# Altium PCB Fan_control.PcbDoc (part 2 of 2)
Units mm, origin at the board's own origin, x right, y up, seen from the top; angles counter-clockwise.
Board outline 271 x 20 mm, 2 copper layers (Top Layer, Bottom Layer), stack 1.571 mm thick; 115 components, 80 nets, 358 pads, 372 vias.
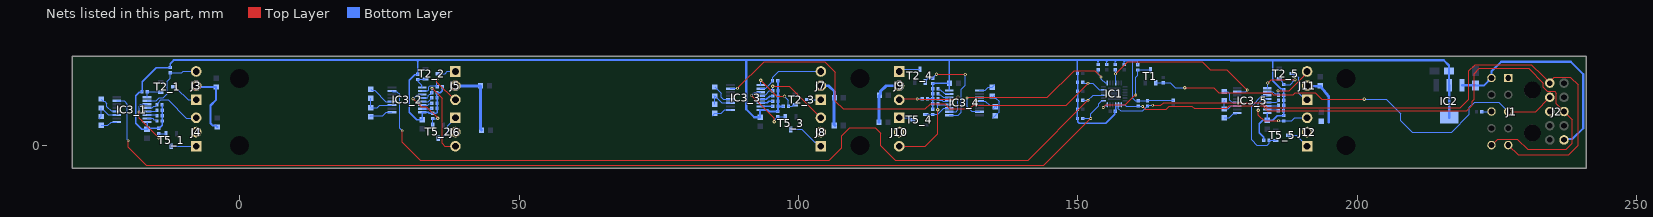
[diagram p2: the nets of this part, all layers, seen from the top]

## Via types
v1: diameter 0.6, hole 0.3, Top Layer to Bottom Layer, tented both sides, 239 vias
v2: diameter 0.5, hole 0.25, Top Layer to Bottom Layer, tented both sides, 88 vias
v3: diameter 0.5, hole 0.2, Top Layer to Bottom Layer, tented both sides, 45 vias

## Nets (pads, with @x,y where several pads share a name; then routed paths per layer and width w, separated by ;. In a path a pad name is that pad's centre, name@x,y a point inside that pad or via, vN(x,y) a via of type N, cw(c..) or ccw(c..) an arc to the next point about the centre after c; other vN are vias at no path point) (continued)
I2C_SDA_0: IC1.1 IC3_1.15 R1.1 | length 192.7
  Top Layer w0.152: v3(-19.963,0.895) -19.97,0.888 -19.97,-0.254 -16.699,-3.524 143.898,-3.524 v3(152.299,4.878)
  Bottom Layer w0.152: IC3_1.15@-21.975,8.055 -20.684,8.055 -20.084,7.455 -20.084,1.11 -19.963,0.989 v3(-19.963,0.895) ; R1.1@150.852,4.878 v3(152.299,4.878) 152.299,5.741 153.722,7.164 153.722,7.488 154.268,8.034 IC1.1@154.546,8.034
I2C_SDA_1: IC1.3 IC3_2.15 R5.1 | length 150.4
  Top Layer w0.152: v3(29.078,2.667) 29.078,0.585 32.278,-2.615 105.46,-2.615 107.729,-0.346 107.729,1.805 109.125,3.201 113.761,3.201 114.7,2.262 114.7,0.025 117.301,-2.576 141.086,-2.576 v3(151.791,8.129)
  Bottom Layer w0.152: IC3_2.15@27.25,9.808 27.355,9.703 28.139,9.703 28.602,9.24 28.602,3.173 29.078,2.697 v3(29.078,2.667) ; R5.1@150.852,8.129 v3(151.791,8.129) 152.696,9.034 154.531,9.034 IC1.3@154.538,9.042 ; R5.1@150.915,8.23 R5.1@150.92,8.225
I2C_SDA_2: IC1.5 IC3_3.15 R8.1 | length 79.4
  Top Layer w0.152: v3(89.069,10.287) 93.826,15.045 104.68,15.045 106.575,13.15 106.575,7.965 107.958,6.583 122.719,6.583 123.619,7.483 126.196,7.483 127.033,6.646 130.647,6.646 131.291,7.29 147.918,7.29 v3(151.817,11.189)
  Bottom Layer w0.152: IC3_3.15@87.825,10.214 87.862,10.251 89.032,10.251 v3(89.069,10.287) ; R8.1@150.852,11.38 151.043,11.189 v3(151.817,11.189) 152.668,11.189 153.823,10.034 IC1.5@154.546,10.034
I2C_SDA_3: IC1.7 IC3_4.15 R10.1 | length 33.8
  Top Layer w0.152: v3(130.15,8.55) 130.244,8.55 130.356,8.662 144.525,8.662 149.301,13.437 153.011,13.437 v3(154.128,12.32)
  Bottom Layer w0.152: v3(130.15,8.55) 130.15,7 130.992,6.158 132.31,6.158 IC3_4.15@132.373,6.095 ; R10.1@153.627,13.585 153.627,12.821 v3(154.128,12.32) 154.195,12.253 154.195,11.923 154.884,11.234 IC1.7@155.246,11.234
I2C_SDA_4: IC1.10 IC3_5.15 R13.1 | length 30.9
  Top Layer w0.152: v3(156.731,12.878) 158.916,15.063 172.225,15.063 173.663,13.625 176.644,13.625 v3(180.311,9.958)
  Bottom Layer w0.152: R13.1@156.711,13.59 156.731,13.569 v3(156.731,12.878) ; IC1.10@156.746,11.234 v3@156.746,12.878 ; IC3_5.15@178.498,9.655 180.008,9.655 v3(180.311,9.958)
I2C_SW_RESET: J1.3 J2.3 R12.2 T1.1 | length 79.9
  Top Layer w0.152: v1(169.115,10.4) 174.275,10.4 175.196,9.479 184.644,9.479 184.977,9.146 188.516,9.146 188.894,9.525 192.434,9.525 193.609,8.35 v1(201.225,8.35) ; J1.3@227,6.122 231.897,6.122 J2.3@234.437,8.662
  Bottom Layer w0.152: T1.1@163.925,11.275 165.22,11.275 R12.2@165.225,11.28 166.519,11.28 167.398,10.4 v1(169.115,10.4) ; v1@201.225,8.306 205.169,8.306 207.736,5.739 207.736,4.496 209.837,2.395 216.845,2.395 220.05,5.6 220.05,6.875 220.962,7.787 225.338,7.787 225.6,7.525 225.6,7.522 J1.3@227,6.122
I2C_SW_RESET_N: IC1.24 R6.2 T1.3 | length 14.6
  Top Layer w0.152: v3(154.535,6.868) 154.535,6.898 154.99,7.353 158.498,7.353 160.101,8.956 160.147,8.956 160.263,9.072 v3(160.357,9.072)
  Bottom Layer w0.152: v3(154.535,6.868) 154.583,6.868 154.957,7.243 155.178,7.243 155.246,7.311 IC1.24@155.246,7.334 ; v3(160.357,9.072) 160.368,9.083 160.368,12.275 160.676,12.583 R6.2@160.676,13.572 T1.3@162.975,13.572
I2C_SW_SCL: IC1.19 J1.10 J2.6 R3.1 | length 113.9
  Top Layer w0.152: v3(161.583,7.038) 162.059,6.562 165.835,6.562 166.347,7.075 170.4,7.075 170.794,6.681 176.627,6.681 177.094,7.149 183.051,7.149 183.9,6.3 219.6,6.3 220.546,7.246 220.546,7.97 220.904,8.327 220.904,12.904 221.829,13.829 230.696,13.829 233.302,11.223 233.302,10.425 233.986,9.74 235.32,9.74 235.625,9.436 235.625,7.474 J2.6@236.977,6.122 238.425,4.674 238.425,0.425 237.355,-0.645 230.473,-0.645 228.653,1.175 225.101,1.175 224.048,0.122 J1.10@224,0.122
  Bottom Layer w0.152: IC1.19@157.746,7.334 158.366,7.334 158.6,7.1 R3.1@160.758,7.1 160.819,7.038 v3(161.583,7.038)
I2C_SW_SDA: IC1.20 J1.5 J2.1 R2.1 | length 117.7
  Top Layer w0.152: v3(163.372,7.245) 164.845,7.245 165.325,7.725 182.925,7.725 183.85,6.8 218.45,6.8 219.946,8.296 219.946,13.396 221.075,14.525 231.124,14.525 233.049,12.6 ; J1.5@227,0.122 228.747,-1.625 237.826,-1.625 239.507,0.056 239.507,10.907 238.133,12.28 235.187,12.28 234.437,11.53 J2.1@234.437,11.202 233.139,12.5 233.139,12.511 233.049,12.6
  Bottom Layer w0.152: IC1.20@157.246,7.334 157.246,6.615 157.628,6.233 161.558,6.233 162.425,7.1 R2.1@162.445,7.1 ; R2.1@162.47,7.075 162.641,7.245 v3(163.372,7.245)
NetC5_1_1: C5_1.1 IC3_1.9 | length 3.1
  Bottom Layer w0.152: C5_1.1@-24.777,3.644 -23.608,3.644 -23.007,4.245 IC3_1.9@-21.975,4.245
NetC5_1_2: C5_1.2 C6_1.2 IC3_1.11 | length 4.9
  Bottom Layer w0.152: C5_1.2@-25.176,4.845 C5_1.2@-24.777,5.244 C6_1.2@-24.777,6.755 ; C6_1.2@-24.396,6.412 -23.5,5.515 IC3_1.11@-21.975,5.515
NetC5_2_1: C5_2.1 IC3_2.9 | length 4.2
  Bottom Layer w0.152: C5_2.1@23.325,5.239 23.483,5.397 25.618,5.397 26.219,5.998 IC3_2.9@27.25,5.998
NetC5_2_2: C5_2.2 C6_2.2 IC3_2.11 | length 5.5
  Bottom Layer w0.152: C6_2.2@23.458,8.507 C6_2.2@23.483,8.507 C5_2.2@23.483,6.997 ; C5_2.2@23.485,6.78 24.575,6.78 25.025,7.23 27.212,7.23 IC3_2.11@27.25,7.268
NetC5_3_1: C5_3.1 IC3_3.9 | length 3.6
  Bottom Layer w0.152: C5_3.1@84.625,5.404 C5_3.1@85.023,5.803 86.193,5.803 86.794,6.404 IC3_3.9@87.825,6.404
NetC5_3_2: C5_3.2 C6_3.2 IC3_3.11 | length 5
  Bottom Layer w0.152: C6_3.2@84.869,9.068 C6_3.2@85.023,8.914 ; C5_3.2@85.023,7.403 C6_3.2@85.023,8.914 ; IC3_3.11@87.825,7.674 86.288,7.674 85.048,8.914 C6_3.2@85.023,8.914
NetC5_4_1: C5_4.1 IC3_4.9 | length 3.1
  Bottom Layer w0.152: IC3_4.9@132.373,9.905 133.377,9.905 133.947,10.475 C5_4.1@134.664,10.475 ; C5_4.1@134.673,10.484 134.698,10.484 135.097,10.883 C5_4.1@135.097,10.908
NetC5_4_2: C5_4.2 C6_4.2 IC3_4.11 | length 7.6
  Bottom Layer w0.152: IC3_4.11@132.373,8.635 134.423,8.635 C5_4.2@134.673,8.884 ; C6_4.2@134.768,4.96 134.768,4.985 135.167,5.384 C6_4.2@135.192,5.384 135.591,5.783 135.672,5.783 135.921,6.031 135.921,7.927 135.312,8.536 135.097,8.536 134.929,8.703 134.929,8.85 C5_4.2@135.097,9.017
NetC5_5_1: C5_5.1 IC3_5.9 | length 2.7
  Bottom Layer w0.152: C5_5.1@176.186,4.989 177.056,4.989 177.789,5.722 178.374,5.722 IC3_5.9@178.498,5.845
NetC5_5_2: C5_5.2 C6_5.2 IC3_5.11 | length 4
  Bottom Layer w0.152: C6_5.2@176.178,8.101 176.203,8.076 176.203,6.611 176.896,6.611 177.4,7.115 IC3_5.11@178.498,7.115
NetC6_1_1: C6_1.1 IC3_1.12 | length 4
  Bottom Layer w0.152: C6_1.1@-24.777,8.355 -24.39,7.967 -24.171,7.967 -23.75,7.547 -23.75,7 -23.024,6.274 -22.099,6.274 IC3_1.12@-21.975,6.15
NetC6_2_1: C6_2.1 IC3_2.12 | length 4.7
  Bottom Layer w0.152: C6_2.1@23.483,10.107 23.656,9.934 24.122,9.934 26.154,7.903 IC3_2.12@27.25,7.903
NetC6_3_1: C6_3.1 IC3_3.12 | length 4.1
  Bottom Layer w0.152: C6_3.1@85.023,10.514 86.166,9.371 86.166,8.698 86.555,8.309 IC3_3.12@87.825,8.309
NetC6_4_1: C6_4.1 IC3_4.12 | length 4.2
  Bottom Layer w0.152: IC3_4.12@132.373,8 133.427,8 134.22,7.207 134.97,7.207 C6_4.1@135.192,6.984 C6_4.1@134.816,6.608 ; C6_4.1@135.443,6.759 C6_4.1@135.443,7.179
NetC6_5_1: C6_5.1 IC3_5.12 | length 3.8
  Bottom Layer w0.152: C6_5.1@176.178,9.701 176.848,9.701 177.201,9.348 177.201,8.128 177.579,7.75 IC3_5.12@178.498,7.75
NetIC3_1_5: IC3_1.5 R22_1.1 | length 1.8
  Bottom Layer w0.152: IC3_1.5@-16.575,6.15 -14.995,6.15 R22_1.1@-14.82,6.325
NetIC3_1_6: IC3_1.6 R21_1.1 | length 1.8
  Bottom Layer w0.152: IC3_1.6@-16.575,5.515 -14.96,5.515 R21_1.1@-14.82,5.375
NetIC3_1_7: IC3_1.7 R23_1.1 | length 2
  Bottom Layer w0.152: IC3_1.7@-16.575,4.88 -15.6,4.88 -15.379,4.659 -15.034,4.659 -14.82,4.445 R23_1.1@-14.82,4.425
NetIC3_2_5: IC3_2.5 R22_2.1 | length 2
  Bottom Layer w0.152: IC3_2.5@32.65,7.903 33.72,7.903 34.152,8.335 34.172,8.335 34.386,8.549 R22_2.1@34.386,8.569
NetIC3_2_6: IC3_2.6 R21_2.1 | length 1.9
  Bottom Layer w0.152: IC3_2.6@32.65,7.268 33.692,7.268 33.957,7.532 34.274,7.532 R21_2.1@34.386,7.644
NetIC3_2_7: IC3_2.7 R23_2.1 | length 1.8
  Bottom Layer w0.152: IC3_2.7@32.65,6.633 34.3,6.633 R23_2.1@34.386,6.719
NetIC3_3_5: IC3_3.5 R22_3.1 | length 2.4
  Bottom Layer w0.25: IC3_3.5@93.225,8.309 94.259,8.309 94.85,8.9 R22_3.1@95.38,8.9
NetIC3_3_6: IC3_3.6 R21_3.1 | length 2.3
  Bottom Layer w0.25: IC3_3.6@93.225,7.674 94.399,7.674 94.7,7.975 R21_3.1@95.375,7.975
NetIC3_3_7: IC3_3.7 R23_3.1 | length 2.2
  Bottom Layer w0.25: IC3_3.7@93.225,7.039 95.369,7.039 R23_3.1@95.38,7.05
NetIC3_4_5: IC3_4.5 R22_4.1 | length 2.2
  Bottom Layer w0.152: R22_4.1@124.94,8.4 124.94,8.38 125.153,8.166 125.683,8.166 125.849,8 IC3_4.5@126.973,8
NetIC3_4_6: IC3_4.6 R21_4.1 | length 2.3
  Bottom Layer w0.152: R21_4.1@124.945,9.325 125.14,9.13 125.368,9.13 125.864,8.635 IC3_4.6@126.973,8.635
NetIC3_4_7: IC3_4.7 R23_4.1 | length 2.4
  Bottom Layer w0.152: R23_4.1@124.945,10.225 125.119,10.051 125.374,10.051 126.068,9.357 126.885,9.357 IC3_4.7@126.973,9.27
NetIC3_5_5: IC3_5.5 R22_5.1 | length 2.2
  Bottom Layer w0.152: IC3_5.5@183.898,7.75 185.48,7.75 185.646,7.916 185.666,7.916 185.88,8.13 R22_5.1@185.88,8.15
NetIC3_5_6: IC3_5.6 R21_5.1 | length 2
  Bottom Layer w0.152: IC3_5.6@183.898,7.115 185.77,7.115 R21_5.1@185.88,7.225
NetIC3_5_7: IC3_5.7 R23_5.1 | length 2
  Bottom Layer w0.152: IC3_5.7@183.898,6.48 185.675,6.48 R23_5.1@185.855,6.3
NetJ1_8: J1.8 R15.2 | length 1.7
  Bottom Layer w0.152: R15.2@222.276,6.122 J1.8@224,6.122
P3V3: C2.1 C7_1.2 C7_2.2 C7_3.2 C7_4.2 C7_5.2 C16.2 IC1.21 IC2.2 IC2.4 IC3_1.8 IC3_2.8 IC3_3.8 IC3_4.8 IC3_5.8 R1.2 R2.2 R3.2 R4.2 R5.2 R6.1 R7.2 R8.2 R9.2 R10.2 R11.2 R13.2 R14.2 R16.2 R17_1.2 R17_2.2 R17_3.2 R17_4.2 R17_5.2 R18_1.2 R18_2.2 R18_3.2 R18_4.2 R18_5.2 R19_1.2 R19_2.2 R19_3.2 R19_4.2 R19_5.2 R20_1.2 R20_2.2 R20_3.2 R20_4.2 R20_5.2 R21_1.2 R21_2.2 R21_3.2 R21_4.2 R21_5.2 R22_1.2 R22_2.2 R22_3.2 R22_4.2 R22_5.2 R23_1.2 R23_2.2 R23_3.2 R23_4.2 R23_5.2 | length 382.2
  Bottom Layer w0.203: R10.2@153.595,14.557 153.595,15.114 ; R11.2@155.153,14.53 155.153,15.19 ; R13.2@156.711,14.53 156.711,15.165 ; R14.2@158.268,14.53 158.288,14.55 158.288,15.19 ; 159.797,15.241 159.797,8.535 160.262,8.07 160.728,8.07 R3.2@160.758,8.04 R2.2@162.445,8.04 162.545,8.14 166.912,8.14 R16.2@166.967,8.085 ; R6.1@160.676,14.512 160.676,15.266
  Bottom Layer w0.254: C7_1.2@-16.589,2.955 -16.387,3.158 -14.397,3.158 -13.88,3.675 R23_1.2@-13.88,4.425 -13.882,4.427 R18_1.2@-13.882,7.297 ; IC3_1.8@-16.575,4.245 -16.575,2.975 -17.5,2.975 -18.573,4.048 -18.573,8.962 -17.98,9.555 -17.59,9.555 -17.468,9.677 -17.468,11.482 -14.967,13.983 R17_1.2@-12.426,13.983 -12.426,14.707 -11.809,15.324 ; 31.868,15.14 31.868,12.811 R19_2.2@31.846,12.789 31.734,12.677 31.327,12.677 30.375,11.725 30.375,5.975 31.7,4.65 C7_2.2@32.65,4.65 IC3_2.8@32.65,5.998 33.702,5.998 33.905,5.795 R20_2.2@34.55,5.795 35.177,5.795 35.326,5.944 R23_2.2@35.326,6.719 R21_2.2@35.326,7.644 35.37,7.688 35.37,8.525 R22_2.2@35.326,8.569 35.304,8.592 R18_2.2@35.304,9.45 ; R18_2.2@35.32,9.47 R18_2.2@35.32,9.45 35.875,9.45 36.272,9.847 36.272,10.507 R17_2.2@36.336,10.572 ; R17_4.2@123.095,8.4 R22_4.2@124,8.4 ; R18_4.2@124.005,7.475 124.025,7.455 R20_4.2@124.025,6.545 ; R18_4.2@124.05,7.475 124.05,9.727 124,9.777 R19_4.2@124,11.155 124.004,11.151 C7_4.2@126.973,11.151 ; IC3_4.8@126.973,9.905 C7_4.2@126.973,11.151 ; 126.973,15.317 C7_4.2@126.973,11.151 ; C7_4.2@127.011,11.151 C7_4.2@126.973,11.151 ; R1.2@149.899,4.89 149.899,5.956 149.904,5.961 149.904,6.496 R4.2@149.912,6.503 ; R1.2@149.912,4.878 149.948,4.842 149.948,4.335 150.244,4.039 154.992,4.039 156.609,5.656 156.609,6.146 C16.2@156.661,6.198 156.746,6.284 IC1.21@156.746,7.334 ; R9.2@149.912,13.006 149.912,15.2 ; R4.2@149.924,6.503 149.924,8.129 149.924,9.754 149.924,11.38 R9.2@149.924,13.006 ; R16.2@166.967,8.085 R16.2@167.022,8.14 ; R20_5.2@183.255,0.975 183.255,1.55 182.475,2.33 182.475,3.926 183.099,4.55 C7_5.2@183.85,4.55 C7_5.2@183.898,4.55 ; IC3_5.8@183.898,5.845 C7_5.2@183.898,4.55 ; 184.875,15.3 184.875,11.604 186.286,10.193 186.662,10.193 R19_5.2@186.825,10.03 ; R19_5.2@186.82,10.025 R17_5.2@186.82,9.075 R22_5.2@186.82,8.15 R21_5.2@186.82,7.225 186.82,6.325 R23_5.2@186.795,6.3 186.795,5.42 R18_5.2@186.825,5.39 185.665,5.39 184.825,4.55 C7_5.2@183.898,4.55
  Bottom Layer w0.381: -11.809,15.324 31.868,15.324 ; 31.869,15.14 31.868,15.142 31.868,15.324 ; 92.012,15.324 90.65,15.324 ; 92.013,15.324 126.973,15.324 149.912,15.324 153.595,15.324 155.153,15.324 156.711,15.324 158.288,15.324 ; R18_3.2@96.3,9.85 R20_3.2@96.3,6.145 94.705,6.145 94.446,6.404 IC3_3.8@93.225,6.404 93.135,6.404 93.125,6.395 C7_3.2@93.125,5.1 92.05,5.1 90.65,6.5 90.65,15.324 ; R18_3.2@96.312,9.858 R17_3.2@96.312,11.608 ; R23_3.2@96.32,7.05 R19_3.2@97.258,7.051 ; 153.595,15.114 153.595,15.299 ; 155.153,15.19 155.153,15.299 ; 156.711,15.165 156.711,15.299 ; 158.288,15.19 158.288,15.299 ; 160.652,15.324 177.287,15.324 ; 31.868,15.324 90.65,15.324
  Bottom Layer w0.4: 158.288,15.299 159.797,15.299 160.652,15.299 160.676,15.275 ; 177.287,15.3 184.875,15.3 215.475,15.3 216.407,14.368 C2.1@216.407,13.335 216.407,10.846 IC2.2@216.428,10.825 IC2.4@216.428,5.025
P5V0: C1.1 IC2.3 J1.6 J2.10 | length 39
  Bottom Layer w0.381: IC2.3@218.728,10.825 221.15,10.825 C1.1@221.175,10.8 222.678,10.8 J1.6@224,12.122 224,13.305 225.72,15.025 238.175,15.025 240.41,12.79 240.41,3.135 238.471,1.196 237.131,1.196 J2.10@236.977,1.042
P12V0: C3.2 C4.2 C8.2 C9.2 C10.2 C11.2 C12.2 C13.2 C14.2 C15.2 J1.1 J2.5 J3.2 J4.2 J5.2 J6.2 J7.2 J8.2 J9.2 J10.2 J11.2 J12.2 | length 53
  Top Layer w0.381: J2.5@234.119,5.931 J2.5@234.386,6.198
  Bottom Layer w0.381: J3.2@-7.874,10.77 -7.608,10.503 C3.2@-4.222,10.503 -4.222,8.23 -5.238,7.214 -5.238,4.039 -4.796,3.597 -4.262,3.597 C4.2@-4.018,3.353
  Bottom Layer w0.508: J5.2@38.572,10.719 C8.2@43.086,10.719 43.086,2.972 C9.2@43.264,2.794 ; J7.2@104.005,10.75 104.023,10.732 105.393,10.732 106.425,9.7 C10.2@106.425,8.6 ; C10.2@106.375,8.65 106.375,3.775 C11.2@106.525,3.625 ; C13.2@114.402,4.192 114.402,8.952 114.696,9.246 114.696,9.746 115.696,10.746 117.95,10.746 J9.2@117.951,10.745 ; J11.2@190.715,10.658 193.375,10.658 193.497,10.504 194.875,8.776 194.875,4.233
PWM1_1: IC3_1.1 R19_1.1 T2_1.1 | length 3.4
  Bottom Layer w0.203: IC3_1.1@-16.575,8.69 -16.553,8.712 R19_1.1@-16.553,9.675 ; R19_1.1@-16.53,9.675 -14.23,9.675 T2_1.1@-14.13,9.575
PWM1_2: IC3_2.1 R19_2.1 T2_2.1 | length 3.2
  Bottom Layer w0.152: IC3_2.1@32.65,10.443 32.601,10.492 32.601,10.789 31.969,11.42 31.969,11.726 R19_2.1@31.846,11.849 31.931,11.934 T2_2.1@33.247,11.934
PWM1_3: IC3_3.1 R19_3.1 T2_3.1 | length 9.7
  Top Layer w0.152: v1(93.225,11.7) 96.1,8.825 v1(97.475,8.825)
  Bottom Layer w0.152: IC3_3.1@93.225,10.849 v1(93.225,11.7) ; v1(97.475,8.825) 98.2,8.1 98.2,7.053 R19_3.1@98.198,7.051 98.916,7.051 99.189,7.324 T2_3.1@99.389,7.324
PWM1_4: IC3_4.1 R19_4.1 T2_4.1 | length 17.3
  Top Layer w0.152: v1(124.675,12.775) 129.8,12.775 v1(129.825,12.75)
  Bottom Layer w0.152: T2_4.1@122.675,11.4 122.899,11.624 122.899,11.828 123.166,12.095 124.02,12.095 124.234,12.309 124.234,12.334 v1(124.675,12.775) ; IC3_4.1@126.973,5.46 128.585,5.46 129.133,6.008 129.133,7.24 129.127,7.246 129.127,7.643 129.133,7.649 129.133,10.125 129.525,10.516 129.525,10.525 129.847,10.847 129.847,12.728 v1(129.825,12.75)
PWM1_5: IC3_5.1 R19_5.1 T2_5.1 | length 10
  Top Layer w0.152: v1(183.975,11.225) 184.55,11.8 188.814,11.8 v1(188.833,11.781)
  Bottom Layer w0.152: IC3_5.1@183.898,10.29 183.975,10.368 v1(183.975,11.225) ; T2_5.1@186.025,11.975 186.21,11.975 186.434,11.751 186.434,11.566 186.618,11.382 186.618,11.177 R19_5.1@186.866,10.929 ; R19_5.1@186.825,10.97 R19_5.1@186.866,10.929 ; v1(188.833,11.781) 187.981,10.929 R19_5.1@186.866,10.929
PWM2_1: IC3_1.3 R20_1.1 T5_1.1 | length 10.8
  Top Layer w0.152: v3@-18.003,6.052 -18.003,4.943 -17.913,4.854 -17.845,4.854 -17.565,4.573 -17.565,4.45 v3(-14.5,1.386)
  Bottom Layer w0.152: v3(-17.996,6.059) -17.996,7.097 -17.673,7.42 IC3_1.3@-16.575,7.42 ; v3(-14.5,1.386) R20_1.1@-14.5,2.18 ; R20_1.1@-14.5,2.18 -13.205,2.18 T5_1.1@-13.2,2.175
PWM2_2: IC3_2.3 R20_2.1 T5_2.1 | length 10
  Top Layer w0.152: v1(31.016,8.433) 32.449,7 33.422,7 35.45,4.972 v1(35.45,4.9)
  Bottom Layer w0.152: v1(31.016,8.433) 31.736,9.152 32.63,9.152 IC3_2.3@32.65,9.173 ; T5_2.1@34.55,3.625 R20_2.1@34.55,4.855 35.405,4.855 v1(35.45,4.9)
PWM2_3: IC3_3.3 R20_3.1 T5_3.1 | length 10.8
  Top Layer w0.152: v1(91.59,8.983) 91.59,8.935 95.65,4.875 v1(95.65,4.3)
  Bottom Layer w0.152: v1(91.59,8.983) 91.601,8.983 92.197,9.579 IC3_3.3@93.225,9.579 ; v1(95.65,4.3) 95.736,4.386 95.736,4.636 96.066,4.966 96.066,4.991 96.275,5.2 T5_3.1@97.65,5.2
PWM2_4: IC3_4.3 R20_4.1 T5_4.1 | length 4.8
  Bottom Layer w0.152: T5_4.1@122.6,5.6 T5_4.1@122.75,5.6 122.78,5.63 124.909,5.63 126.009,6.73 IC3_4.3@126.973,6.73
PWM2_5: IC3_5.3 R20_5.1 T5_5.1 | length 15.2
  Bottom Layer w0.152: IC3_5.3@183.898,9.02 182.983,9.02 181.062,7.099 181.062,2.058 181.067,2.053 181.067,1.033 182.037,0.063 183.838,0.063 184.195,0.42 R20_5.1@184.195,0.975 185.375,0.975 T5_5.1@185.425,0.925
PWM_FAN1_1: J3.1 T2_1.3 | length 4.8
  Bottom Layer w0.152: T2_1.3@-11.737,10.5 -11.538,10.301 -11.321,10.301 -9.25,8.23 J3.1@-7.879,8.23
PWM_FAN1_2: J5.1 T2_2.3 | length 3.2
  Bottom Layer w0.152: T2_2.3@35.547,12.884 36.748,12.884 37.154,13.29 J5.1@38.6,13.29
PWM_FAN1_3: J7.1 T2_3.3 | length 2.3
  Bottom Layer w0.152: T2_3.3@101.689,8.21 J7.1@104,8.21
PWM_FAN1_4: J9.1 T2_4.3 | length 3.9
  Bottom Layer w0.152: J9.1@118,13.29 118.409,13.699 T2_4.3@121.724,13.699
PWM_FAN1_5: J11.1 T2_5.3 | length 6.4
  Bottom Layer w0.152: T2_5.3@188.325,12.925 188.549,12.701 188.949,12.701 189.475,12.175 189.475,9.425 J11.1@191.025,7.875
PWM_FAN2_1: J4.1 T5_1.3 | length 4.4
  Bottom Layer w0.152: T5_1.3@-12.25,-0.125 -12.248,-0.127 J4.1@-7.803,-0.127
PWM_FAN2_2: J6.1 T5_2.3 | length 5.3
  Bottom Layer w0.152: T5_2.3@35.5,1.325 36.1,1.325 37.225,2.45 37.225,3.615 J6.1@38.614,5.004
PWM_FAN2_3: J8.1 T5_3.3 | length 6.8
  Bottom Layer w0.152: T5_3.3@98.481,2.941 100.559,2.941 102.911,0.589 103.321,0.589 J8.1@104,-0.09
PWM_FAN2_4: J10.1 T5_4.3 | length 2.6
  Bottom Layer w0.152: J10.1@118,4.99 119.937,4.99 120.026,4.901 120.026,4.874 120.25,4.65 T5_4.3@120.45,4.65
PWM_FAN2_5: J12.1 T5_5.3 | length 4.1
  Bottom Layer w0.152: T5_5.3@187.725,1.875 189.035,1.875 J12.1@191,-0.09
TACH1_1: IC3_1.2 J3.3 R17_1.1 | length 12.8
  Bottom Layer w0.152: IC3_1.2@-16.575,8.055 -16.552,8.079 -14.917,8.079 -14.387,8.608 -13.643,8.608 -12.969,9.283 -12.969,11.531 -12.426,12.074 R17_1.1@-12.426,13.043 -10.382,13.043 -10.115,13.31 J3.3@-7.879,13.31
TACH1_2: IC3_2.2 J5.3 R17_2.1 | length 9.7
  Top Layer w0.152: v3(35.287,11.838) 35.287,11.388 38.465,8.21 J5.3@38.6,8.21
  Bottom Layer w0.152: IC3_2.2@32.659,9.816 33.643,9.816 33.856,10.029 33.856,10.529 34.081,10.754 35.176,10.754 R17_2.1@35.287,10.643 ; v3(35.287,11.838) R17_2.1@35.287,10.643 ; R17_2.1@35.367,10.563 R17_2.1@35.287,10.643
TACH1_3: IC3_3.2 J7.3 R17_3.1 | length 12.5
  Bottom Layer w0.152: IC3_3.2@93.225,10.214 93.276,10.265 94.14,10.265 95.141,11.266 95.141,11.391 95.255,11.505 95.38,11.505 95.38,12.23 96.44,13.29 J7.3@104,13.29
TACH1_4: IC3_4.2 J9.3 R17_4.1 | length 15.7
  Top Layer w0.152: J9.3@117.956,8.332 118,8.375 v3(121.25,8.375) 121.272,8.353 128.153,8.353 v1(128.525,8.725)
  Bottom Layer w0.152: v3(121.25,8.375) 121.275,8.4 R17_4.1@122.155,8.4 ; IC3_4.2@126.973,6.095 128.195,6.095 128.525,6.425 v1(128.525,8.725)
TACH1_5: IC3_5.2 J11.3 R17_5.1 | length 9.8
  Top Layer w0.152: v3(185.811,9.838) 187.813,9.838 191,13.025 J11.3@191,13.29
  Bottom Layer w0.152: IC3_5.2@183.898,9.655 184.895,9.655 185.264,9.286 185.786,9.286 R17_5.1@185.894,9.178 ; v3(185.811,9.838) 185.811,9.744 185.88,9.675 R17_5.1@185.88,9.075
TACH2_1: IC3_1.4 J4.3 R18_1.1 | length 10.5
  Bottom Layer w0.152: IC3_1.4@-16.575,6.785 -15.637,6.785 -15.351,7.071 -15.036,7.071 -14.822,7.284 R18_1.1@-14.822,7.297 ; R18_1.1@-14.608,7.51 -14.608,7.705 -14.12,8.194 -12.812,8.194 -9.571,4.953 J4.3@-7.803,4.953
TACH2_2: IC3_2.4 J6.3 R18_2.1 | length 16.3
  Top Layer w0.152: v3(34.425,10.275) 36.224,8.476 36.224,0.424 36.723,-0.076 J6.3@38.649,-0.076
  Bottom Layer w0.152: IC3_2.4@32.65,8.538 32.723,8.61 33.623,8.61 33.775,8.762 33.775,9.014 33.977,9.216 34.166,9.216 34.38,9.43 R18_2.1@34.38,9.45 34.425,9.495 v3(34.425,10.275)
TACH2_3: IC3_3.4 J8.3 R18_3.1 | length 14.3
  Top Layer w0.152: v1(95.4,10.65) 98.34,10.65 J8.3@104,4.99
  Bottom Layer w0.152: IC3_3.4@93.225,8.944 93.8,8.944 94.007,9.151 94.095,9.151 94.794,9.85 R18_3.1@95.38,9.85 95.38,10.63 v1(95.4,10.65)
TACH2_4: IC3_4.4 J10.3 R18_4.1 | length 15.3
  Top Layer w0.152: J10.3@118,-0.09 122.685,-0.09 124.953,2.178 124.953,6.417 v1(124.932,6.438)
  Bottom Layer w0.152: v1(124.932,6.438) 124.945,6.452 R18_4.1@124.945,7.475 125.048,7.372 IC3_4.4@126.966,7.372
TACH2_5: IC3_5.4 J12.3 R18_5.1 | length 13.4
  Top Layer w0.152: v1(182.275,6.325) 182.275,5.5 183.3,4.475 v3(185.875,4.475)
  Bottom Layer w0.152: v1(182.275,6.325) 182.275,7.635 182.983,8.343 183.855,8.343 IC3_5.4@183.898,8.385 ; v3(185.875,4.475) R18_5.1@186.8,4.475 ; R18_5.1@186.825,4.45 188.25,4.45 188.79,4.99 J12.3@191,4.99
pads on no net: B1.1 B2.1 B3.1 B4.1 B5.1 B6.1 IC1.12 IC1.13 IC1.14 IC1.15 IC1.16 IC1.17 IC3_1.13 IC3_2.13 IC3_3.13 IC3_4.13 IC3_5.13 J1.7 J1.11 J1.12 J2.9

## Polygon pours and split planes (outlines as drawn)
P12V0 on Bottom Layer "P12V0_L02_P014" (solid, remove dead copper, pour order 14): 227.825,8.637 227.138,7.95 221.125,7.95 219.95,6.775 219.93,5.195 216.22,1.448 205.328,1.448 201.798,4.979 188.398,4.979 184.016,0.635 122.965,0.635 118.621,4.979 107.462,4.979 106.322,3.839 102.889,3.839 99.685,0.635 56.002,0.635 53.36,3.277 37.485,3.277 36.571,2.363 5.735,2.363 3.531,4.567 -2.685,4.598 -3.409,3.839 -4.529,3.839 -4.664,3.481 -9.149,3.497 -9.149,-4 218.875,-4 224.175,1.4 227.925,1.4 230.5,3.975 233.3,3.975 234.025,4.7 235.628,4.7 236.139,5.211 236.139,6.63 235.444,7.325 234.549,7.325 233.175,8.662 233.175,10.75 230.65,13.275 228.7,13.275 228.575,13.4 226.25,13.4 225.95,13.1 225.95,11.275 227.825,9.4
GND on Bottom Layer "GND_L02_P015" (solid, remove dead copper, pour order 15): 213.871,1.454 219.325,-4 240.881,-4 240.888,-4.007 240.888,16 -30,16 -30,-4 -9.225,-4 -9.225,3.615 -4.592,3.615 -4.58,3.603 -3.61,4.572 3.48,4.572 5.684,2.368 36.52,2.368 37.434,3.282 53.309,3.282 55.951,0.641 99.666,0.641 102.511,3.486 105.913,3.486 107.406,4.979 119.121,4.979 123.434,0.666 171.82,0.666 171.846,0.641 185.141,0.641 189.682,5.182 201.544,5.182 205.272,1.454
GND on Top Layer "GND_L01_P004" (solid, remove dead copper, pour order 4): -30,15.914 -30,-4 240.863,-4 240.863,15.914

## Keep-outs
Keep-Out Layer:
  lines w0.102: -0.111,-2.848 cw(c0,0) 0.001,-2.85 ; -0.111,9.152 cw(c0,12) 0.001,9.15 ; 110.889,-2.848 cw(c111,0) 111.001,-2.85 ; 110.889,9.152 cw(c111,12) 111.001,9.15 ; 197.889,-2.848 cw(c198,0) 198.001,-2.85 ; 197.889,9.152 cw(c198,12) 198.001,9.15

## Silkscreen, mask and mechanical layers (free items; w line width, h text height)
Top Overlay:
  drawing of 1243 lines, arcs and shapes, not listed
Bottom Overlay:
  circle w0.254: c0,12.025 r3.014
  circle w0.254: c0,0.025 r3.014
  circle w0.254: c111,0.025 r3.014
  circle w0.254: c111,12.025 r3.014
  circle w0.254: c198,12.025 r3.014
  circle w0.254: c198,0.025 r3.014
  text "DIOT_Fan_controler_v.P_version" at 168.952,0.458 h1.27
  text "WUT ISE 2025" at 162.069,-1.684 h1.02
Top Solder:
  region: 155.402,10.374 157.6,10.374 157.6,8.176 155.402,8.176
Mechanical 1:
  drawing of 195 lines, arcs and shapes, not listed
  text "Layer" at 21.893,49.721 h1.52
  text "Name" at 32.305,49.721 h1.52
  text "Material" at 55.921,49.721 h1.52
  text "Thickness" at 77.759,49.721 h1.52
  text "Constant" at 94.265,49.721 h1.52
  text "Board Layer Stack" at 108.739,49.721 h1.52
  text "Top Overlay" at 32.305,46.673 h1.52
  text "Top Solder" at 32.305,43.625 h1.52
  text "Solder Resist" at 55.921,43.625 h1.52
  text "0,010mm" at 77.759,43.625 h1.52
  text "3.5" at 94.265,43.625 h1.52
  text "1" at 21.893,40.577 h1.52
  text "Top Layer" at 32.305,40.577 h1.52
  text "0,036mm" at 77.759,40.577 h1.52
  text "Dielectric 1" at 32.305,37.529 h1.52
  text "FR-4" at 55.921,37.529 h1.52
  text "1,500mm" at 77.759,37.529 h1.52
  text "4.8" at 94.265,37.529 h1.52
  text "2" at 21.893,34.481 h1.52
  text "Bottom Layer" at 32.305,34.481 h1.52
  text "0,036mm" at 77.759,34.481 h1.52
  text "Bottom Solder" at 32.305,31.433 h1.52
  text "Solder Resist" at 55.921,31.433 h1.52
  text "0,010mm" at 77.759,31.433 h1.52
  text "3.5" at 94.265,31.433 h1.52
  text "Bottom Overlay" at 32.305,28.385 h1.52
  text "Total board thickness:" at 21.893,25.337 h1.52
  text "1,591mm" at 77.759,25.337 h1.52

## Text inside footprints (layer, text, board x,y; h text height)
J2: Top Overlay "10" at 238.856,-0.228 h1.02 r270; Mechanical 14 "10" at 236.007,-0.378 h1.02 r270
J3: Top Overlay "1" at -8.993,6.638 h1 r90; Mechanical 14 "1" at -8.993,6.638 h1 r90
J4: Top Overlay "1" at -8.993,-1.662 h1 r90; Mechanical 14 "1" at -8.993,-1.662 h1 r90
J5: Top Overlay "1" at 39.793,14.862 h1 r270; Mechanical 14 "1" at 39.793,14.862 h1 r270
J6: Top Overlay "1" at 39.793,6.562 h1 r270; Mechanical 14 "1" at 39.793,6.562 h1 r270
J7: Top Overlay "1" at 102.807,6.638 h1 r90; Mechanical 14 "1" at 102.807,6.638 h1 r90
J8: Top Overlay "1" at 102.807,-1.662 h1 r90; Mechanical 14 "1" at 102.807,-1.662 h1 r90
J9: Top Overlay "1" at 119.193,14.862 h1 r270; Mechanical 14 "1" at 119.193,14.862 h1 r270
J10: Top Overlay "1" at 119.193,6.562 h1 r270; Mechanical 14 "1" at 119.193,6.562 h1 r270
J11: Top Overlay "1" at 189.807,6.638 h1 r90; Mechanical 14 "1" at 189.807,6.638 h1 r90
J12: Top Overlay "1" at 189.807,-1.662 h1 r90; Mechanical 14 "1" at 189.807,-1.662 h1 r90